# EAGLE board Carrier3 (EAGLE 6.1)
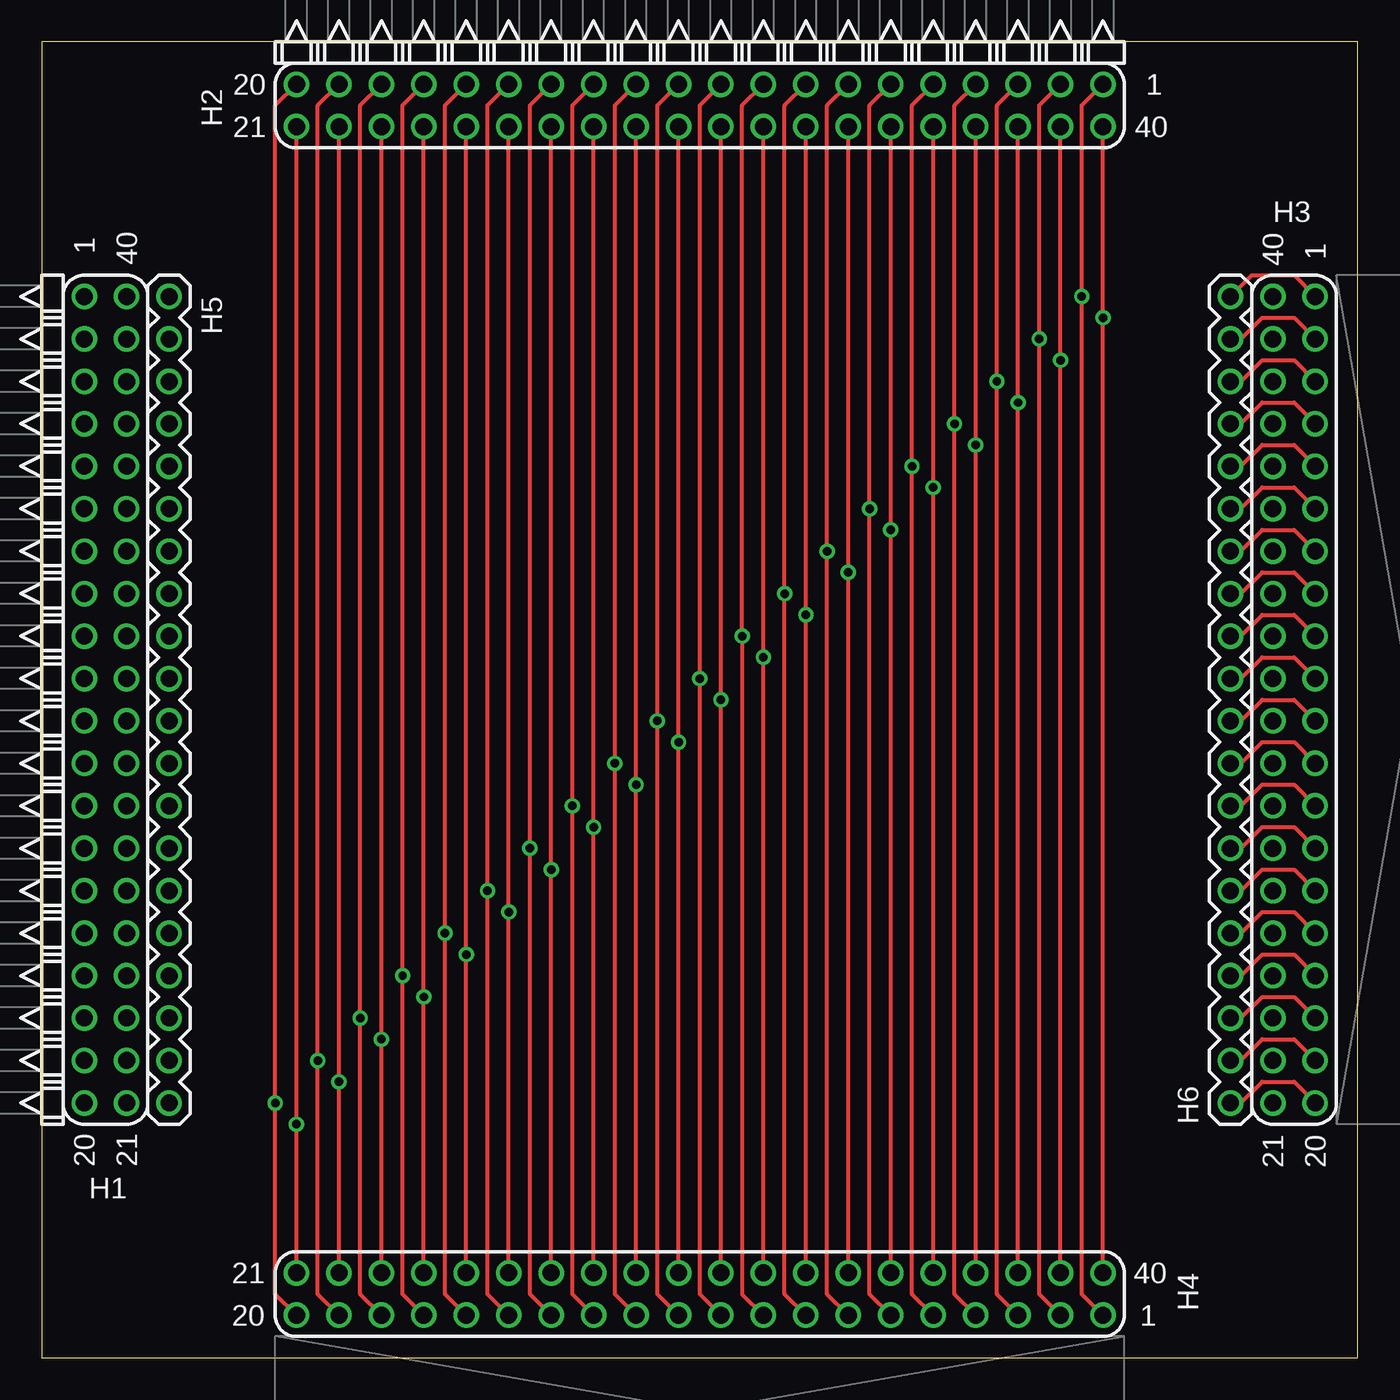
[diagram p0: board, top side]
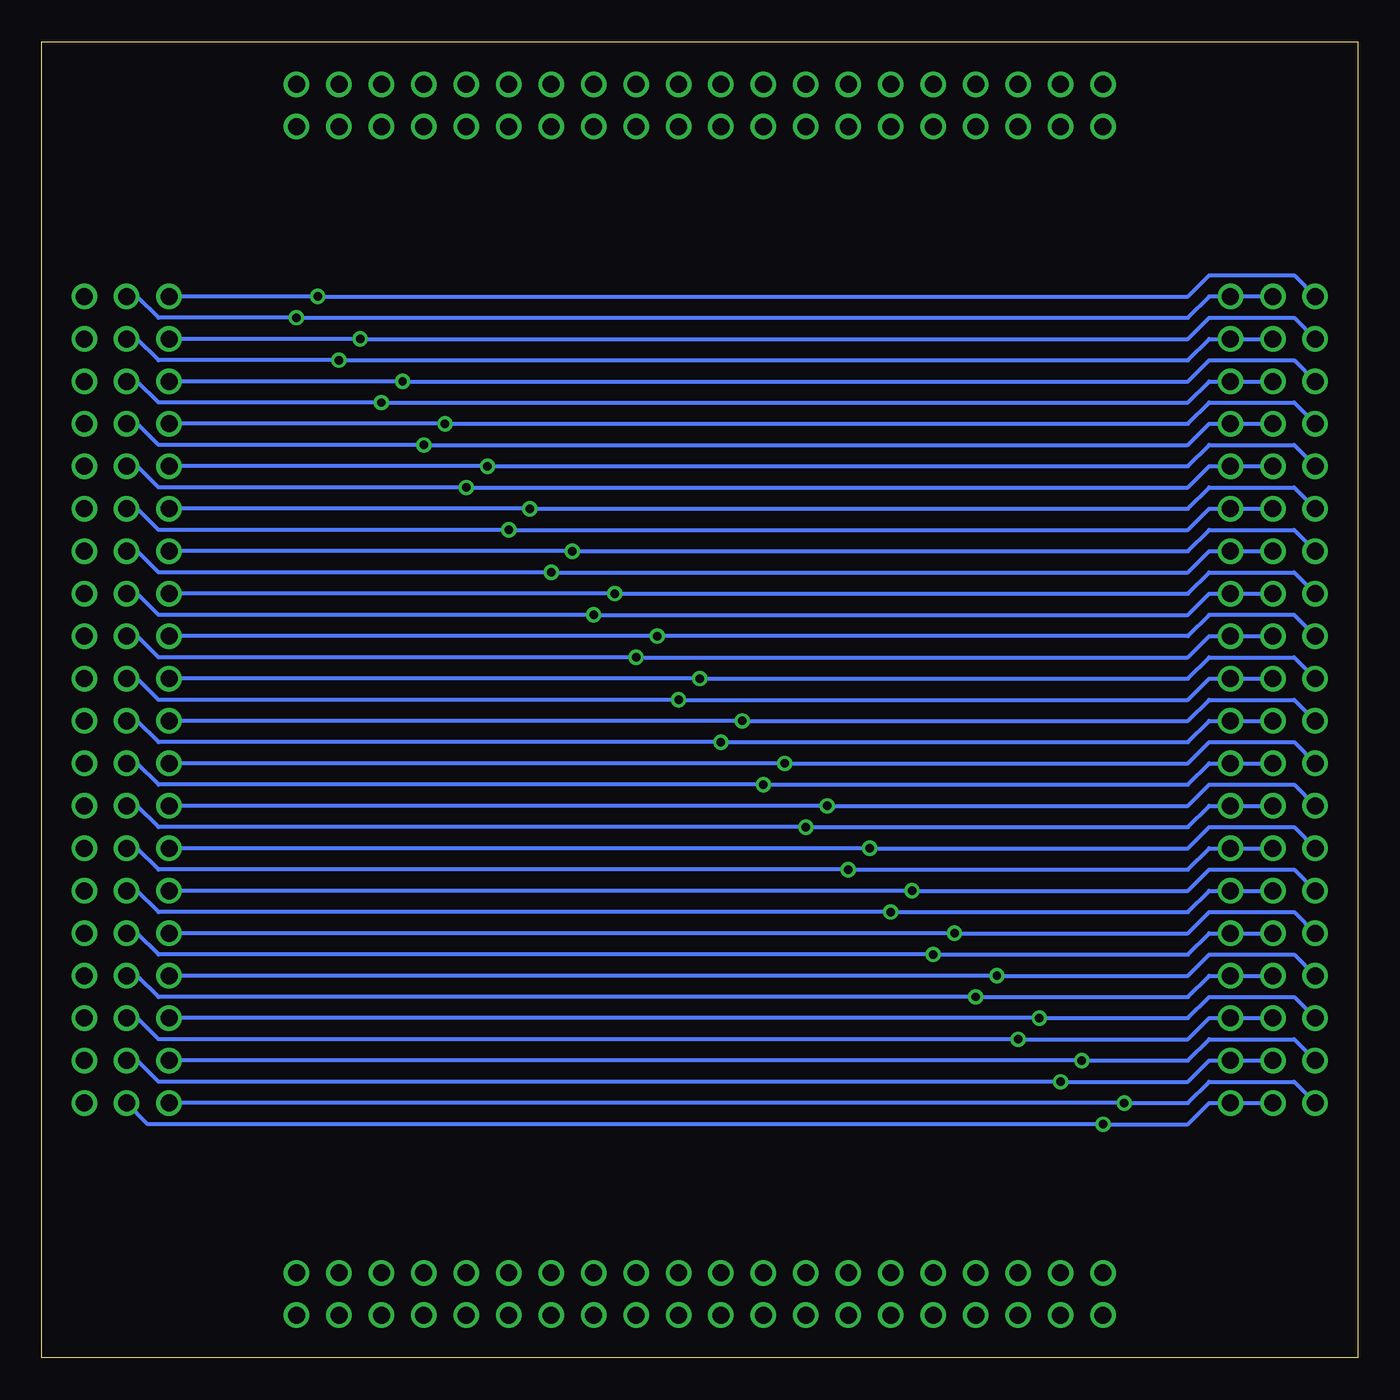
[diagram p1: board, bottom side, seen from below]

Size 78.74 x 78.74 mm. Coordinates in mm from the lower left corner, seen from the top.
Outline: 0,0 78.74,0 78.74,78.74 0,78.74 0,0
Copper layers (1*16): Top 0.035mm / dielectric 1.5mm / Bottom 0.035mm
Design rules: minimum track width 10mil, minimum drill 24mil, track to track 16mil, track to pad 12mil, pad to pad 16mil, via to via 16mil, smd to smd 8mil, copper to edge 40mil, drill to drill 8mil, minimum pad ring 10mil, minimum via ring 8mil, stop-mask expansion 4mil, vias tented up to drill 0mil, thermal gap 10mil

## Footprints (pad centres in the part's own frame; a part is rotated, then mirrored left to right if it is on the bottom)
HM20X2-PTH = drill 1.016: 1 24.13,1.27; 2 21.59,1.27; 3 19.05,1.27; 4 16.51,1.27; 5 13.97,1.27; 6 11.43,1.27; 7 8.89,1.27; 8 6.35,1.27; 9 3.81,1.27; 10 1.27,1.27; 11 -1.27,1.27; 12 -3.81,1.27; 13 -6.35,1.27; 14 -8.89,1.27; 15 -11.43,1.27; 16 -13.97,1.27; 17 -16.51,1.27; 18 -19.05,1.27; 19 -21.59,1.27; 20 -24.13,1.27; 21 -24.13,-1.27; 22 -21.59,-1.27; 23 -19.05,-1.27; 24 -16.51,-1.27; 25 -13.97,-1.27; 26 -11.43,-1.27; 27 -8.89,-1.27; 28 -6.35,-1.27; 29 -3.81,-1.27; 30 -1.27,-1.27; 31 1.27,-1.27; 32 3.81,-1.27; 33 6.35,-1.27; 34 8.89,-1.27; 35 11.43,-1.27; 36 13.97,-1.27; 37 16.51,-1.27; 38 19.05,-1.27; 39 21.59,-1.27; 40 24.13,-1.27
HF20X2-PTH = drill 1.016: 1 -24.13,1.27; 2 -21.59,1.27; 3 -19.05,1.27; 4 -16.51,1.27; 5 -13.97,1.27; 6 -11.43,1.27; 7 -8.89,1.27; 8 -6.35,1.27; 9 -3.81,1.27; 10 -1.27,1.27; 11 1.27,1.27; 12 3.81,1.27; 13 6.35,1.27; 14 8.89,1.27; 15 11.43,1.27; 16 13.97,1.27; 17 16.51,1.27; 18 19.05,1.27; 19 21.59,1.27; 20 24.13,1.27; 21 24.13,-1.27; 22 21.59,-1.27; 23 19.05,-1.27; 24 16.51,-1.27; 25 13.97,-1.27; 26 11.43,-1.27; 27 8.89,-1.27; 28 6.35,-1.27; 29 3.81,-1.27; 30 1.27,-1.27; 31 -1.27,-1.27; 32 -3.81,-1.27; 33 -6.35,-1.27; 34 -8.89,-1.27; 35 -11.43,-1.27; 36 -13.97,-1.27; 37 -16.51,-1.27; 38 -19.05,-1.27; 39 -21.59,-1.27; 40 -24.13,-1.27
HM20X1-PTH = drill 1.016: 1 -24.13,0; 2 -21.59,0; 3 -19.05,0; 4 -16.51,0; 5 -13.97,0; 6 -11.43,0; 7 -8.89,0; 8 -6.35,0; 9 -3.81,0; 10 -1.27,0; 11 1.27,0; 12 3.81,0; 13 6.35,0; 14 8.89,0; 15 11.43,0; 16 13.97,0; 17 16.51,0; 18 19.05,0; 19 21.59,0; 20 24.13,0

## Placement (x,y rotation side)
H1  HM20X2-PTH  [HM20X2-PTH]  3.81,39.37 90 top
H2  HM20X2-PTH  [HM20X2-PTH]  39.37,74.93 0 top
H3  HF20X2-PTH  [HF20X2-PTH]  74.93,39.37 270 top
H4  HF20X2-PTH  [HF20X2-PTH]  39.37,3.81 180 top
H5  HM20X1-PTH  [HM20X1-PTH]  7.62,39.37 270 top
H6  HM20X1-PTH  [HM20X1-PTH]  71.12,39.37 90 top

## Library data of the parts
H1-H6 = august24

## Nets
1: H1.1 H2.1 H3.1 H4.1 H6.20
2: H1.2 H2.2 H3.2 H4.2 H6.19
3: H1.3 H2.3 H3.3 H4.3 H6.18
4: H1.4 H2.4 H3.4 H4.4 H6.17
5: H1.5 H2.5 H3.5 H4.5 H6.16
6: H1.6 H2.6 H3.6 H4.6 H6.15
7: H1.7 H2.7 H3.7 H4.7 H6.14
8: H1.8 H2.8 H3.8 H4.8 H6.13
9: H1.9 H2.9 H3.9 H4.9 H6.12
10: H1.10 H2.10 H3.10 H4.10 H6.11
11: H1.11 H2.11 H3.11 H4.11 H6.10
12: H1.12 H2.12 H3.12 H4.12 H6.9
13: H1.13 H2.13 H3.13 H4.13 H6.8
14: H1.14 H2.14 H3.14 H4.14 H6.7
15: H1.15 H2.15 H3.15 H4.15 H6.6
16: H1.16 H2.16 H3.16 H4.16 H6.5
17: H1.17 H2.17 H3.17 H4.17 H6.4
18: H1.18 H2.18 H3.18 H4.18 H6.3
19: H1.19 H2.19 H3.19 H4.19 H6.2
20: H1.20 H2.20 H3.20 H4.20 H6.1
21: H1.21 H2.21 H3.21 H4.21 H5.20
22: H1.22 H2.22 H3.22 H4.22 H5.19
23: H1.23 H2.23 H3.23 H4.23 H5.18
24: H1.24 H2.24 H3.24 H4.24 H5.17
25: H1.25 H2.25 H3.25 H4.25 H5.16
26: H1.26 H2.26 H3.26 H4.26 H5.15
27: H1.27 H2.27 H3.27 H4.27 H5.14
28: H1.28 H2.28 H3.28 H4.28 H5.13
29: H1.29 H2.29 H3.29 H4.29 H5.12
30: H1.30 H2.30 H3.30 H4.30 H5.11
31: H1.31 H2.31 H3.31 H4.31 H5.10
32: H1.32 H2.32 H3.32 H4.32 H5.9
33: H1.33 H2.33 H3.33 H4.33 H5.8
34: H1.34 H2.34 H3.34 H4.34 H5.7
35: H1.35 H2.35 H3.35 H4.35 H5.6
36: H1.36 H2.36 H3.36 H4.36 H5.5
37: H1.37 H2.37 H3.37 H4.37 H5.4
38: H1.38 H2.38 H3.38 H4.38 H5.3
39: H1.39 H2.39 H3.39 H4.39 H5.2
40: H1.40 H2.40 H3.40 H4.40 H5.1

## Tracks (layer width: path | path; a pad name or v marks a point on that pad's centre or on a via)
1  (via drill 0.51)
  Top 0.254: H4.1 62.23,3.81 v62.23,63.5 62.23,74.93 H2.1 | H6.20 72.39,64.77 74.93,64.77 H3.1
  Bottom 0.254: H1.1 3.81,64.77 8.89,64.77 10.16,63.5 v62.23,63.5 H6.20
2  (via drill 0.51)
  Top 0.254: H4.2 59.69,3.81 v59.69,60.96 59.69,74.93 H2.2 | H3.2 74.93,62.23 73.02,62.23 71.75,60.96 H6.19
  Bottom 0.254: H1.2 3.81,62.23 8.89,62.23 10.16,60.96 v59.69,60.96 H6.19
3  (via drill 0.51)
  Top 0.254: H4.3 57.15,3.81 v57.15,58.42 57.15,74.93 H2.3 | H6.18 71.75,58.42 73.02,59.69 74.93,59.69 H3.3
  Bottom 0.254: H1.3 3.81,59.69 8.89,59.69 10.16,58.42 v57.15,58.42 H6.18
4  (via drill 0.51)
  Top 0.254: H4.4 54.61,3.81 v54.61,55.88 54.61,74.93 H2.4 | H6.17 71.75,55.88 73.02,57.15 74.93,57.15 H3.4
  Bottom 0.254: H1.4 3.81,57.15 8.89,57.15 10.16,55.88 v54.61,55.88 H6.17
5  (via drill 0.51)
  Top 0.254: H4.5 52.07,3.81 v52.07,53.34 52.07,74.93 H2.5 | H6.16 71.75,53.34 73.02,54.61 74.93,54.61 H3.5
  Bottom 0.254: H1.5 3.81,54.61 8.89,54.61 10.16,53.34 v52.07,53.34 H6.16
6  (via drill 0.51)
  Top 0.254: H4.6 49.53,3.81 v49.53,50.8 49.53,74.93 H2.6 | H6.15 71.75,50.8 73.02,52.07 74.93,52.07 H3.6
  Bottom 0.254: H1.6 3.81,52.07 8.89,52.07 10.16,50.8 v49.53,50.8 H6.15
7  (via drill 0.51)
  Top 0.254: H4.7 46.99,3.81 v46.99,48.26 46.99,74.93 H2.7 | H6.14 71.75,48.26 73.02,49.53 74.93,49.53 H3.7
  Bottom 0.254: H1.7 3.81,49.53 8.89,49.53 10.16,48.26 v46.99,48.26 H6.14
8  (via drill 0.51)
  Top 0.254: H4.8 44.45,3.81 v44.45,45.72 44.45,74.93 H2.8 | H6.13 71.75,45.72 73.02,46.99 74.93,46.99 H3.8
  Bottom 0.254: H1.8 3.81,46.99 8.89,46.99 10.16,45.72 v44.45,45.72 H6.13
9  (via drill 0.51)
  Top 0.254: H4.9 41.91,3.81 v41.91,43.18 41.91,74.93 H2.9 | H6.12 71.75,43.18 73.02,44.45 74.93,44.45 H3.9
  Bottom 0.254: H1.9 3.81,44.45 8.89,44.45 10.16,43.18 v41.91,43.18 H6.12
10  (via drill 0.51)
  Top 0.254: H4.10 39.37,3.81 v39.37,40.64 39.37,74.93 H2.10 | H6.11 71.75,40.64 73.02,41.91 74.93,41.91 H3.10
  Bottom 0.254: H1.10 3.81,41.91 8.89,41.91 10.16,40.64 v39.37,40.64 H6.11
11  (via drill 0.51)
  Top 0.254: H4.11 36.83,3.81 v36.83,38.1 36.83,74.93 H2.11 | H6.10 71.75,38.1 73.02,39.37 74.93,39.37 H3.11
  Bottom 0.254: H1.11 3.81,39.37 8.89,39.37 10.16,38.1 v36.83,38.1 H6.10
12  (via drill 0.51)
  Top 0.254: H4.12 34.29,3.81 v34.29,35.56 34.29,74.93 H2.12 | H6.9 71.75,35.56 73.02,36.83 74.93,36.83 H3.12
  Bottom 0.254: H1.12 3.81,36.83 8.89,36.83 10.16,35.56 v34.29,35.56 H6.9
13  (via drill 0.51)
  Top 0.254: H4.13 31.75,3.81 v31.75,33.02 31.75,74.93 H2.13 | H6.8 71.75,33.02 73.02,34.29 74.93,34.29 H3.13
  Bottom 0.254: H1.13 3.81,34.29 8.89,34.29 10.16,33.02 v31.75,33.02 H6.8
14  (via drill 0.51)
  Top 0.254: H4.14 29.21,3.81 v29.21,30.48 29.21,74.93 H2.14 | H6.7 71.75,30.48 73.02,31.75 74.93,31.75 H3.14
  Bottom 0.254: H1.14 3.81,31.75 8.89,31.75 10.16,30.48 v29.21,30.48 H6.7
15  (via drill 0.51)
  Top 0.254: H2.15 26.67,74.93 v26.67,27.94 26.67,3.81 H4.15 | H6.6 71.75,27.94 73.02,29.21 74.93,29.21 H3.15
  Bottom 0.254: H1.15 3.81,29.21 8.89,29.21 10.16,27.94 v26.67,27.94 H6.6
16  (via drill 0.51)
  Top 0.254: H4.16 24.13,3.81 v24.13,25.4 24.13,74.93 H2.16 | H6.5 71.75,25.4 73.02,26.67 74.93,26.67 H3.16
  Bottom 0.254: H1.16 3.81,26.67 8.89,26.67 10.16,25.4 v24.13,25.4 H6.5
17  (via drill 0.51)
  Top 0.254: H4.17 21.59,3.81 v21.59,22.86 21.59,74.93 H2.17 | H6.4 71.75,22.86 73.02,24.13 74.93,24.13 H3.17
  Bottom 0.254: H1.17 3.81,24.13 8.89,24.13 10.16,22.86 v21.59,22.86 H6.4
18  (via drill 0.51)
  Top 0.254: H2.18 19.05,74.93 v19.05,20.32 19.05,3.81 H4.18 | H6.3 71.75,20.32 73.02,21.59 74.93,21.59 H3.18
  Bottom 0.254: H6.3 v19.05,20.32 10.16,20.32 8.89,21.59 3.81,21.59 H1.18
19  (via drill 0.51)
  Top 0.254: H2.19 16.51,74.93 v16.51,17.78 16.51,3.81 H4.19 | H6.2 71.75,17.78 73.02,19.05 74.93,19.05 H3.19
  Bottom 0.254: H6.2 v16.51,17.78 10.16,17.78 8.89,19.05 3.81,19.05 H1.19
20  (via drill 0.51)
  Top 0.254: H4.20 13.97,3.81 v13.97,15.24 13.97,74.93 H2.20 | H6.1 71.75,15.24 73.02,16.51 74.93,16.51 H3.20
  Bottom 0.254: H1.20 3.81,16.51 8.89,16.51 10.16,15.24 v13.97,15.24 H6.1
21  (via drill 0.51)
  Top 0.254: H4.21 v15.24,13.97 H2.21
  Bottom 0.254: H1.21 H5.20 8.89,15.24 10.16,13.97 v15.24,13.97 72.39,13.97 H3.21
22  (via drill 0.51)
  Top 0.254: H2.22 v17.78,16.51 H4.22
  Bottom 0.254: H1.22 H5.19 8.89,17.78 10.16,16.51 v17.78,16.51 71.75,16.51 73.02,17.78 H3.22
23  (via drill 0.51)
  Top 0.254: H2.23 v20.32,19.05 H4.23
  Bottom 0.254: H1.23 H5.18 8.89,20.32 10.16,19.05 v20.32,19.05 71.75,19.05 73.02,20.32 H3.23
24  (via drill 0.51)
  Top 0.254: H2.24 v22.86,21.59 H4.24
  Bottom 0.254: H1.24 H5.17 8.89,22.86 10.16,21.59 v22.86,21.59 71.75,21.59 73.02,22.86 H3.24
25  (via drill 0.51)
  Top 0.254: H2.25 v25.4,24.13 H4.25
  Bottom 0.254: H1.25 H5.16 8.89,25.4 10.16,24.13 v25.4,24.13 71.75,24.13 73.02,25.4 H3.25
26  (via drill 0.51)
  Top 0.254: H2.26 v27.94,26.67 H4.26
  Bottom 0.254: H1.26 H5.15 8.89,27.94 10.16,26.67 v27.94,26.67 71.75,26.67 73.02,27.94 H3.26
27  (via drill 0.51)
  Top 0.254: H4.27 v30.48,29.21 H2.27
  Bottom 0.254: H1.27 H5.14 8.89,30.48 10.16,29.21 v30.48,29.21 71.75,29.21 73.02,30.48 H3.27
28  (via drill 0.51)
  Top 0.254: H4.28 v33.02,31.75 H2.28
  Bottom 0.254: H1.28 H5.13 8.89,33.02 10.16,31.75 v33.02,31.75 71.75,31.75 73.02,33.02 H3.28
29  (via drill 0.51)
  Top 0.254: H4.29 v35.56,34.29 H2.29
  Bottom 0.254: H1.29 H5.12 8.89,35.56 10.16,34.29 v35.56,34.29 71.75,34.29 73.02,35.56 H3.29
30  (via drill 0.51)
  Top 0.254: H4.30 v38.1,36.83 H2.30
  Bottom 0.254: H1.30 H5.11 8.89,38.1 10.16,36.83 v38.1,36.83 71.75,36.83 73.02,38.1 H3.30
31  (via drill 0.51)
  Top 0.254: H4.31 v40.64,39.37 H2.31
  Bottom 0.254: H1.31 H5.10 8.89,40.64 10.16,39.37 v40.64,39.37 71.75,39.37 73.02,40.64 H3.31
32  (via drill 0.51)
  Top 0.254: H4.32 v43.18,41.91 H2.32
  Bottom 0.254: H1.32 H5.9 8.89,43.18 10.16,41.91 v43.18,41.91 71.75,41.91 73.02,43.18 H3.32
33  (via drill 0.51)
  Top 0.254: H4.33 v45.72,44.45 H2.33
  Bottom 0.254: H1.33 H5.8 8.89,45.72 10.16,44.45 v45.72,44.45 71.75,44.45 73.02,45.72 H3.33
34  (via drill 0.51)
  Top 0.254: H4.34 v48.26,46.99 H2.34
  Bottom 0.254: H1.34 H5.7 8.89,48.26 10.16,46.99 v48.26,46.99 71.75,46.99 73.02,48.26 H3.34
35  (via drill 0.51)
  Top 0.254: H4.35 v50.8,49.53 H2.35
  Bottom 0.254: H1.35 H5.6 8.89,50.8 10.16,49.53 v50.8,49.53 71.75,49.53 73.02,50.8 H3.35
36  (via drill 0.51)
  Top 0.254: H4.36 v53.34,52.07 H2.36
  Bottom 0.254: H1.36 H5.5 8.89,53.34 10.16,52.07 v53.34,52.07 71.75,52.07 73.02,53.34 H3.36
37  (via drill 0.51)
  Top 0.254: H4.37 v55.88,54.61 H2.37
  Bottom 0.254: H1.37 H5.4 8.89,55.88 10.16,54.61 v55.88,54.61 71.75,54.61 73.02,55.88 H3.37
38  (via drill 0.51)
  Top 0.254: H4.38 v58.42,57.15 H2.38
  Bottom 0.254: H1.38 H5.3 8.89,58.42 10.16,57.15 v58.42,57.15 71.75,57.15 73.02,58.42 H3.38
39  (via drill 0.51)
  Top 0.254: H4.39 v60.96,59.69 H2.39
  Bottom 0.254: H1.39 H5.2 8.89,60.96 10.16,59.69 v60.96,59.69 71.75,59.69 73.02,60.96 H3.39
40  (via drill 0.51)
  Top 0.254: H4.40 v63.5,62.23 H2.40
  Bottom 0.254: H1.40 H5.1 8.89,63.5 10.16,62.23 v63.5,62.23 71.75,62.23 73.02,63.5 H3.40